# EAGLE board version4 (EAGLE 8.0.1)
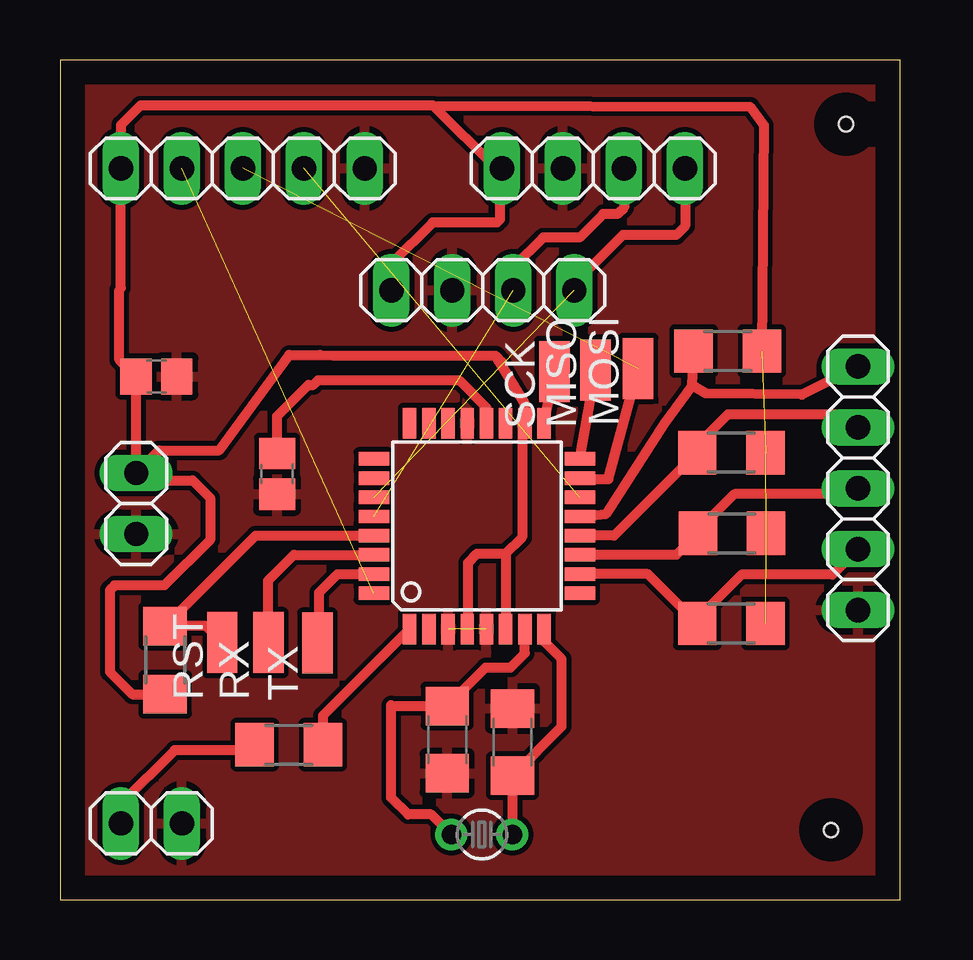
[diagram p0: board, top side]
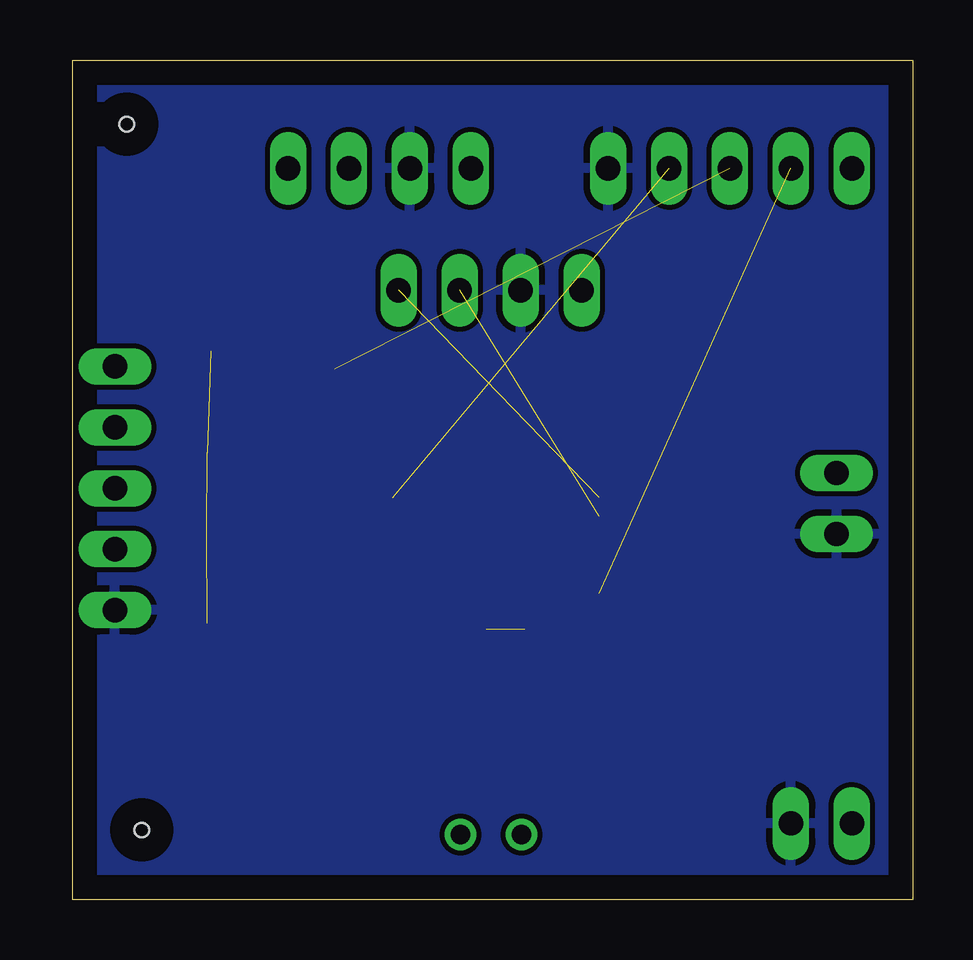
[diagram p1: board, bottom side, seen from below]

Size 35 x 35 mm. Coordinates in mm from the lower left corner, seen from the top.
Outline: 0,0 35,0 35,35 0,35 0,0
Copper layers (1*16): Top 0.035mm / dielectric 1.5mm / Bottom 0.035mm
Design rules "default": minimum track width 10mil, minimum drill 24mil, track to track 8mil, track to pad 8mil, pad to pad 8mil, via to via 8mil, smd to smd 8mil, copper to edge 40mil, drill to drill 8mil, minimum pad ring 10mil, minimum via ring 8mil, stop-mask expansion 4mil, vias tented up to drill 0mil, thermal gap 10mil
Holes 0.6 mm at 32.12,2.9 32.75,32.33

## Footprints (pad centres in the part's own frame; a part is rotated, then mirrored left to right if it is on the bottom)
1X05 = drill 1.016 long: 1 -5.08,0; 2 -2.54,0; 3 0,0; 4 2.54,0; 5 5.08,0
C1206 = smd 1.6 x 1.8: 1 -1.4,0; 2 1.4,0
C0805 = smd 1.3 x 1.5: 1 -0.85,0; 2 0.85,0
SMD1,27-2,54 = smd 1.27 x 2.54: 1 0,0
1X02 = drill 1.016 long: 1 -1.27,0; 2 1.27,0
1X04 = drill 1.016 long: 1 -3.81,0; 2 -1.27,0; 3 1.27,0; 4 3.81,0
TC26V = drill 0.813: 1 -1.27,0; 2 1.27,0
R1206 = smd 1.6 x 1.803: 1 -1.422,0; 2 1.422,0
TQFP32-08 = smd 1.27 x 0.559: 1 -4.293,2.8; 2 -4.293,2; 3 -4.293,1.2; 4 -4.293,0.4; 5 -4.293,-0.4; 6 -4.293,-1.2; 7 -4.293,-2; 8 -4.293,-2.8; 17 4.293,-2.8; 18 4.293,-2; 19 4.293,-1.2; 20 4.293,-0.4; 21 4.293,0.4; 22 4.293,1.2; 23 4.293,2; 24 4.293,2.8 | smd 0.559 x 1.27: 9 -2.8,-4.293; 10 -2,-4.293; 11 -1.2,-4.293; 12 -0.4,-4.293; 13 0.4,-4.293; 14 1.2,-4.293; 15 2,-4.293; 16 2.8,-4.293; 25 2.8,4.293; 26 2,4.293; 27 1.2,4.293; 28 0.4,4.293; 29 -0.4,4.293; 30 -1.2,4.293; 31 -2,4.293; 32 -2.8,4.293

## Placement (x,y rotation side)
BTN  [1X05]  33.25,17.14 270 top
C1  22pF  [C1206]  18.86,6.57 90 top
C2  22pF  [C1206]  16.13,6.67 270 top
C3  0.1uF  [C0805]  4.02,21.8 0 top
C5  0.1uF  [C0805]  9.04,17.75 270 top
MISO  [SMD1,27-2,54]  22.32,22.07 0 top
MOSI  [SMD1,27-2,54]  24.09,22.14 0 top
MOT  [1X02]  3.81,3.17 0 top
OLED  [1X04]  17.61,25.4 0 top
PWR  [1X02]  3.17,16.51 270 top
Q1  16MHz  [TC26V]  17.57,2.71 180 top
R1  10K  [R1206]  4.38,9.98 270 top
R2  100k  [R1206]  27.82,22.86 0 top
R3  100k  [R1206]  27.98,18.63 0 top
R4  100k  [R1206]  28,15.27 0 top
R5  100k  [R1206]  27.98,11.51 0 top
R6  100  [R1206]  9.53,6.46 180 top
RST  [SMD1,27-2,54]  6.76,10.71 0 top
RTC  [1X04]  22.23,30.48 0 top
RX  [SMD1,27-2,54]  8.68,10.71 0 top
SCK  [SMD1,27-2,54]  20.6,22.02 0 top
SIM  [1X05]  7.62,30.48 0 top
TX  [SMD1,27-2,54]  10.72,10.69 0 top
U1  ATMEGA328  [TQFP32-08]  17.37,15.57 90 top

## Library data of the parts
BTN MOT OLED PWR RTC SIM = pinhead
C1-C3 C5 R1-R6 = adafruit
MISO MOSI RST RX SCK TX = wirepad
Q1 = adafruit; OC_FARNELL: unknown; OC_NEWARK: unknown
U1 = thecustomgeek

## Nets
A0: U1.23
A1: U1.24
A2: U1.25
A3: U1.26
A4: OLED.4 RTC.4 U1.27
A5: OLED.3 RTC.3 U1.28
A6: U1.19
A7: U1.22
AREF: C5.1 U1.20
D0: RX.1 U1.30
D1: TX.1 U1.31
D2: SIM.2 U1.32
D3: R6.1 U1.1
D4: U1.2
D5: U1.9
D6: BTN.4 R5.1 U1.10
D7: BTN.3 R4.1 U1.11
D8: BTN.2 R3.1 U1.12
D9: BTN.1 R2.1 U1.13
D10: SIM.4 U1.14
D11: MOSI.1 SIM.3 U1.15
D12: MISO.1 U1.16
D13: SCK.1 U1.17
GND: BTN.5 C1.2 C2.2 C3.2 C5.2 MOT.2 OLED.2 PWR.2 RTC.2 SIM.5 U1.3 U1.5 U1.21
N$1: MOT.1 R6.2
N$43: C2.1 Q1.2 U1.7
N$44: C1.1 Q1.1 U1.8
RST: R1.1 RST.1 U1.29
VCC: C3.1 OLED.1 PWR.1 R1.2 R2.2 R3.2 R4.2 R5.2 RTC.1 SIM.1 U1.4 U1.6 U1.18

## Tracks (layer width: path | path; a pad name or v marks a point on that pad's centre or on a via)
A4  (1 unrouted)
  Top 0.406: RTC.4 26.05,30.46 26.05,28.07 25.68,27.7 23.45,27.7 21.43,25.68 OLED.4
A5  (1 unrouted)
  Top 0.406: RTC.3 23.5,28.85 23.23,28.57 22.62,28.57 21.65,27.6 20.12,27.6 18.89,26.36 OLED.3
AREF
  Top 0.406: C5.1 9.05,20.15 10.35,21.45 10.55,21.45 10.75,21.65 16.62,21.65 17.77,20.5 U1.20
D0
  Top 0.406: RX.1 8.68,13.3 9.74,14.37 U1.30
D1
  Top 0.406: TX.1 10.8,10.77 10.8,12.8 11.57,13.57 U1.31
D2  (1 unrouted)
D3
  Top 0.406: U1.1 10.95,7.66 R6.1
D6
  Top 0.406: BTN.4 32.2,13.55 28.4,13.55 26.55,11.7 R5.1 24.49,13.57 U1.10
D7
  Top 0.406: BTN.3 33.01,16.9 28.1,16.9 26.58,15.38 R4.1 25.68,14.37 U1.11
D8
  Top 0.406: BTN.2 32.71,20.23 27.82,20.23 26.55,18.95 R3.1 23.09,15.17 U1.12
D9
  Top 0.406: U1.13 22.75,16.07 25.2,19.87 26.35,21.43 | 26.35,21.43 R2.1 | BTN.1 30.93,21.05 26.9,21.1 26.35,21.43
D10  (1 unrouted)
D11  (1 unrouted)
  Top 0.406: U1.15 21.71,17.52 22.85,17.52 MOSI.1
D12
  Top 0.406: 21.75,18.45 U1.16 MISO.1
D13
  Top 0.406: U1.17 SCK.1
GND  (1 unrouted)
  pour Top: 0,35 0,0 35,0 35,35
  pour Bottom: 0,35 35,35 35,0 0,0
N$1
  Top 0.406: R6.2 7.88,6.22 4.78,6.22 2.54,3.99 MOT.1
N$43
  Top 0.406: Q1.2 15.46,3.55 14.5,3.55 13.8,4.25 13.8,8.1 13.83,8.07 C2.1 17.73,9.68 18.77,9.68 19.37,10.27 U1.7
N$44
  Top 0.406: Q1.1 18.86,2.72 C1.1 20.9,7.21 20.9,10.03 20.17,10.76 U1.8
RST
  Top 0.406: U1.29 9.33,15.17 9.32,15.18 8.15,15.18 R1.1 6.07,11.4 RST.1
VCC  (3 unrouted)
  Top 0.406: PWR.1 C3.1 2.48,22.5 2.48,25.43 2.54,25.49 SIM.1 2.55,32.3 3.35,33.1 15.55,33.1 | 15.55,33.1 18.17,30.48 RTC.1 18.32,30.39 18.32,28.35 18.2,28.23 15.53,28.23 13.8,26.5 OLED.1 | PWR.1 3.48,17.48 5.53,17.48 6.25,16.75 6.25,15 4.35,13.1 2.27,13.1 2.08,12.9 2.08,9.5 3.02,8.56 R1.2 | PWR.1 4.12,18.73 6.62,18.73 9.55,22.7 10.82,22.7 11.4,22.68 18.15,22.68 | 18.15,22.68 18.31,22.41 19.37,20.66 U1.18 19.25,19.74 19.25,15.1 18.57,14.42 | 18.57,14.42 U1.6 | U1.4 17,11.31 17,14.05 17.37,14.42 18.57,14.42 | 18.15,22.68 18.42,22.41 | 15.55,33.1 28.75,33.05 29.32,32.27 R2.2